# Altium PCB PCB1.PcbDoc
Units mm, origin at the board's own origin, x right, y up, seen from the top; angles counter-clockwise.
Board outline 59 x 26.5 mm, 2 copper layers (Top Layer, Bottom Layer); 34 components, 31 nets, 124 pads, 70 vias.
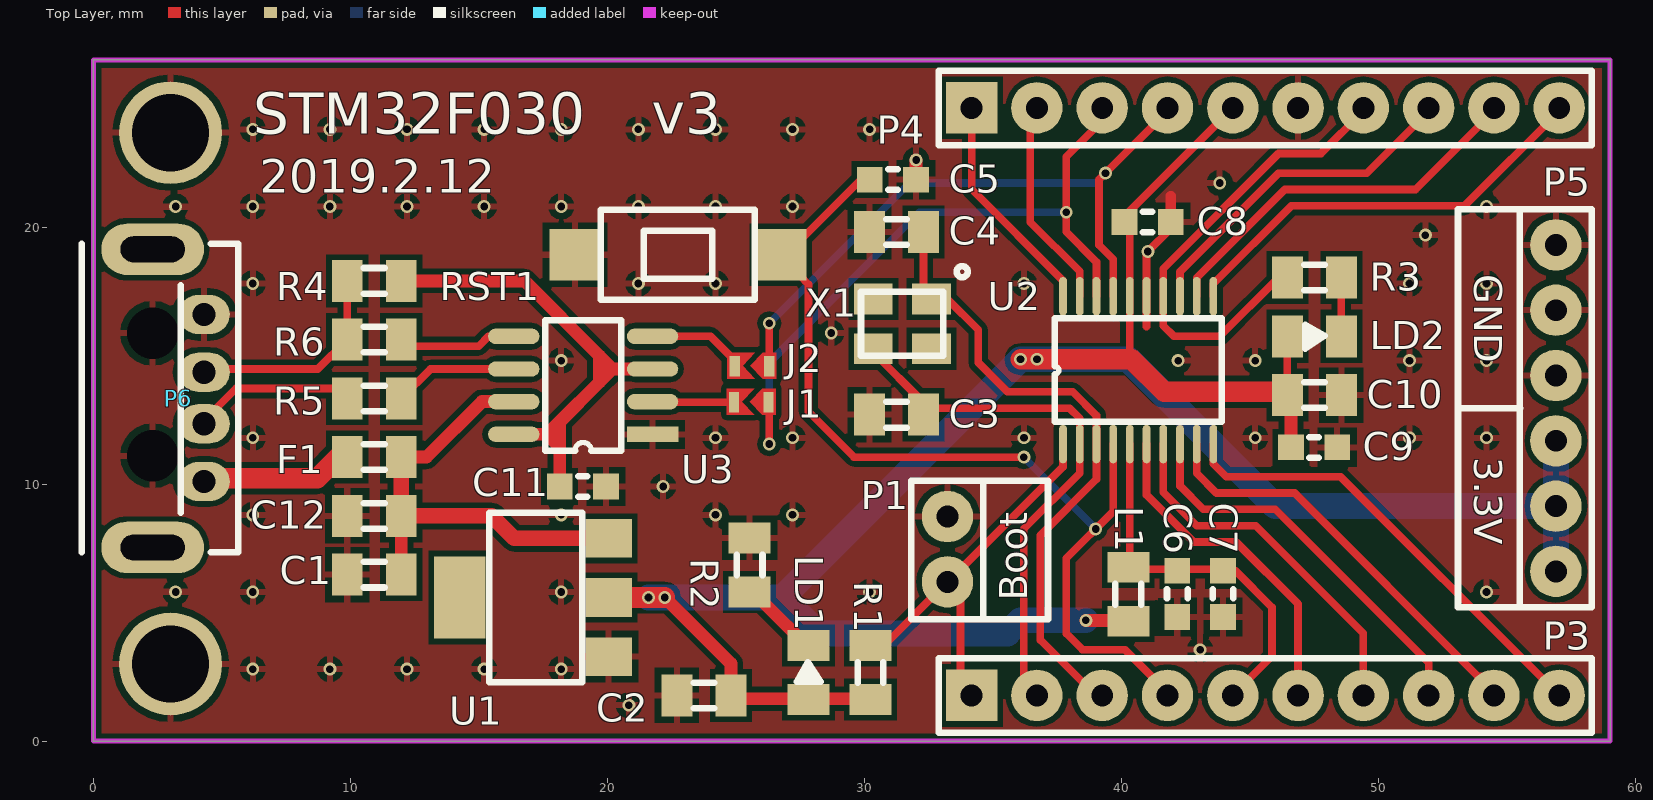
[diagram p0: Top Layer view]
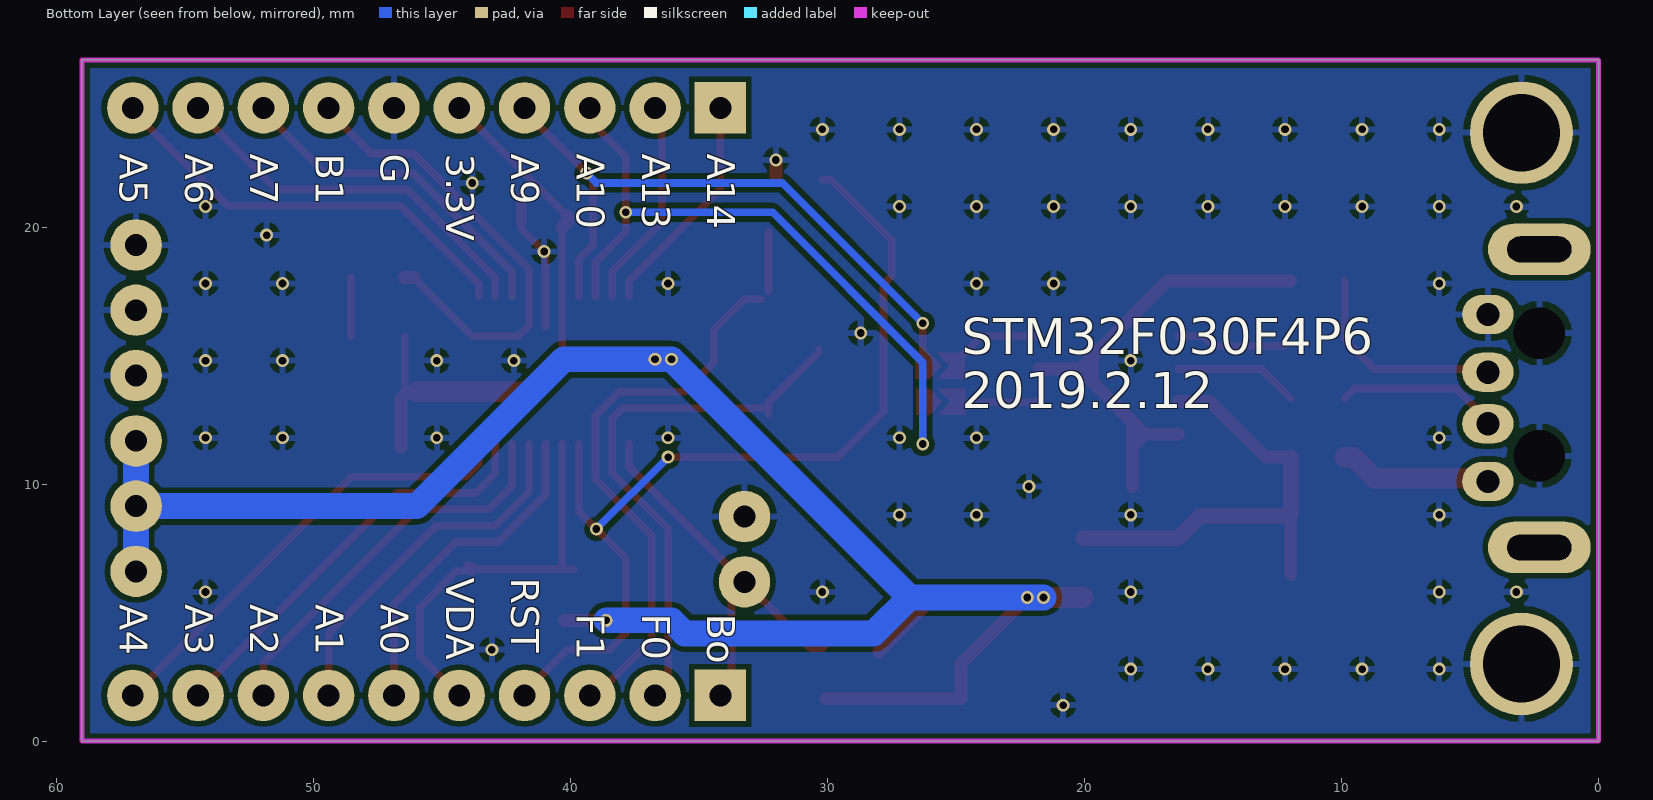
[diagram p1: Bottom Layer view, seen from below]

## Layer stack, top to bottom
Top Solder: solder mask 0.0102, Solder Resist, Dk 3.5
Top Layer: signal copper 0.0356
Dielectric 1: dielectric 0.32, FR-4, Dk 4.8
Bottom Layer: signal copper 0.0356
Bottom Solder: solder mask 0.0102, Solder Resist, Dk 3.5

## Board outline
0,0 0,26.5 59,26.5 59,0

## Design rules (kind name [scope] priority, off if disabled: settings)
Clearance [All] p1: gap=0.21
PolygonConnect [All] p1: connectstyle=Relief reliefconductorwidth=0.254 reliefentries=4 polygonreliefangle="90 Angle" airgapwidth=0.254
RoutingVias [All] p1: holewidth=0.5 width=1.5 viastyle="Through Hole" minholewidth=0.5 minwidth=1.5 maxholewidth=0.5 maxwidth=1.5
ShortCircuit [All] p1: allowed=TRUE
SolderMaskExpansion [All] p1: expansion=0.102
Width [All] p1: maxlimit=1 minlimit=0.25 preferedwidth=0.3
29 further rules are at their usual default settings.

## Classes and differential pairs
component class Sheet1: C1 C2 C3 C4 C5 C6 C7 C8 C9 C10 C11 C12 F1 J1 J2 L1 LD1 LD2 P1 P3 P4 P5 R1 R2 R3 R4 R5 R6 RST1 U1 U3 X1

## Components (designator, comment, footprint, x,y, rotation, side; value= is the part's Value field where it differs from the comment)
C1 "10uF,0805" C0805 10.922,6.477 r180 top
C2 "1uF,0805" C0805 23.749,1.778 r180 top
C3 "15pF,0805" C0805 31.242,12.7 r0 top
C4 "15pF,0805" C0805 31.242,19.812 r180 top
C5 "0.1uF,0603" C0603 31.115,21.844 r0 top
C6 "1uF,0603" C0603 42.164,5.715 r270 top
C7 "0.01uF,0603" C0603 43.942,5.715 r270 top
C8 "0.1uF,0603" C0603 41.021,20.193 r0 top
C9 "0.1uF,0603" C0603 47.498,11.43 r0 top
C10 "4.7uF,0805" C0805 47.498,13.462 r0 top
C11 "0.1uF,0603" C0603 19.05,9.906 r0 top
C12 "10uF,0805" C0805 10.922,8.763 r180 top
F1 "500mA" F0805 10.922,11.049 r180 top
J1 "Jump_2" Jp0603 26.518,13.208 r180 top
J2 "Jump_2" Jp0603 26.543,14.605 r180 top
L1 "80,0805" L0805 40.259,5.715 r90 top
LD1 "G,0805" LED0805 27.813,2.667 r90 top
LD2 "W,0805" LED0805 47.498,15.748 r0 top
P1 "Header_2" Header_2 35.052,12.192 r270 top
P3 "Header_10" Header_10 34.163,1.778 r90 top
P4 "Header_10" Header_10 34.163,24.638 r90 top
P5 "Header_6" Header_6 56.896,16.764 r90 top
P6 "Comment" USB-AO2 2.505,13.386 r270 top
R1 "10K,0805" R0805 30.226,2.667 r270 top
R2 "10K,0805" R0805 25.527,6.858 r270 top
R3 "10K,0805" R0805 47.498,18.034 r0 top
R4 "1.5K,0805" R0805 10.922,17.907 r180 top
R5 "22R,0805" R0805 10.922,13.335 r180 top
R6 "22R,0805" R0805 10.922,15.621 r180 top
RST1 "SW_2P" SW_2P_3 22.733,18.923 r0 top
U1 "AMS1117" SOT-223 17.145,5.588 r90 top
U2 "Comment" TSSOP20 37.719,11.557 r90 top
U3 "PL2303SA" SOP8 19.05,13.843 r180 top
X1 "16MHz" XTAL_SMD_3225 33.06,14.986 r180 top

## Footprints (in the part's own frame and the unit in brackets; to place one, negate y for a bottom-side part, rotate by r counter-clockwise, add the part's x,y. Pads: shape width x height; smd on the part's side, far side on the other; paste and mask are expansions set on the pad)
C0603 [mm]
  rect 1x1 smd: 01(-0.911,0) 02(0.886,0)
  silkscreen extent -0.19,-0.4 0.17,0.4, body extent -0.81,-0.41 0.81,0.41, height 0.58
C0805 [mm]
  rect 1.2x1.63 smd: 01(-1.05,0) 02(1.05,0)
  silkscreen extent -0.4,-0.5 0.4,0.5, body extent -1.05,-0.5 1.05,0.5, height 0.58
F0805 [mm]
  rect 1.2x1.63 smd: 01(-1.05,0) 02(1.05,0)
  silkscreen extent -0.4,-0.5 0.4,0.5, body extent -1.05,-0.5 1.05,0.5, height 0.5
Header_2 [mm]
  round 2 hole 0.85: 01(3.454,-1.829) 02(5.994,-1.829)
  silkscreen extent 2.05,-3.23 7.44,-0.43, body extent 2.18,-3.04 7.26,-0.62, height 11.6
Header_6 [mm]
  round 2 hole 0.85: 01(-10.16,0) 02(-7.62,0) 03(-5.08,0) 04(-2.54,0) 05(0,0) 06(2.54,0)
  silkscreen extent -11.56,-1.4 3.94,1.4, body extent -11.43,-1.21 3.81,1.21, height 11.6
Header_10 [mm]
  rect 2x2 hole 0.85: 01(0,0)
  round 2 hole 0.85: 02(0,-2.54) 03(0,-5.08) 04(0,-7.62) 05(0,-10.16) 06(0,-12.7) 07(0,-15.24) 08(0,-17.78) 09(0,-20.32) 10(0,-22.86)
  silkscreen extent -1.45,-24.13 1.45,1.27, body extent -1.21,-24.13 1.21,1.27, height 11.6
Jp0603 [mm]
  rect 0.4x0.8 smd: 01(0.254,0.025) 02(1.6,0.025)
  Top Layer region: -0.025,0.508 -0.025,-0.508 0.508,-0.508 0.991,0 0.508,0.508
  Top Layer region: 0.813,0.508 1.289,0 0.813,-0.508 1.88,-0.508 1.88,0.508
L0805 [mm]
  rect 1.2x1.63 smd: 01(-1.05,0) 02(1.05,0)
  silkscreen extent -0.4,-0.5 0.4,0.5, body extent -1.05,-0.5 1.05,0.5, height 0.58
LED0805 [mm]
  rect 1.2x1.63 smd: 01(-1.05,0) 02(1.05,0)
  silkscreen extent -0.36,-0.49 0.41,0.45, body extent -1.03,-0.62 0.97,0.62, height 0.81
R0805 [mm]
  rect 1.2x1.63 smd: 01(-1.05,0) 02(1.05,0)
  silkscreen extent -0.4,-0.5 0.4,0.5, body extent -1.05,-0.5 1.05,0.5, height 0.58
SOP8 [mm]
  rect 2x0.6 smd: 01(-2.7,1.905)
  oval 2x0.6 smd: 02(-2.7,0.635) 03(-2.7,-0.635) 04(-2.7,-1.905) 05(2.7,-1.905) 06(2.7,-0.635) 07(2.7,0.635) 08(2.7,1.905)
  silkscreen extent -1.47,-2.54 1.47,2.54, body extent -2.97,-2.39 3.02,2.44, height 1.7
SOT-223 [mm] "SOT-223"
  rect 1.5x1.8 smd: 01(-2.3,-2.9) 02(0,-2.9) 03(2.3,-2.9)
  rect 3.2x2 smd: 04(0,2.9)
  silkscreen extent -3.3,-1.86 3.3,1.75, body extent -3.24,-3.51 3.26,3.45, height 1.65
SW_2P_3 [mm]
  rect 2x2 smd: 01(-4,0) 02(4,0)
  silkscreen extent -3,-1.75 3,1.75, body extent -3,-1.73 3,1.75, height 4.7
TSSOP20 [mm]
  oval 1.5x0.3 smd: 01(0,0) 02(0,-0.65) 03(0,-1.3) 04(0,-1.95) 05(0,-2.6) 06(0,-3.25) 07(0,-3.9) 08(0,-4.55) 09(0,-5.2) 10(0,-5.85) 11(5.75,-5.85) 12(5.75,-5.2) 13(5.75,-4.55) 14(5.75,-3.9) 15(5.75,-3.25) 16(5.75,-2.6) 17(5.75,-1.95) 18(5.75,-1.3) 19(5.75,-0.65) 20(5.75,0)
  silkscreen extent 0.86,-6.18 4.9,0.33, body extent -0.38,-6.22 6.17,0.38, height 1.2
USB-AO2 [mm]
  oval 2x4 hole 1 slot 2.5 at 90 deg: 0(-5.749,-0.203) 0(5.851,-0.203)
  round 1 hole 2: 0(-2.484,-0.203) 0(2.286,-0.203)
  oval 1.524x2 hole 0.9: 01(-3.214,1.797) 02(-0.964,1.797) 03(1.036,1.797) 04(3.286,1.797)
  silkscreen extent -5.96,-2.95 6.04,3.12
XTAL_SMD_3225 [mm]
  rect 1.5x1.2 smd: 01(0.457,-2.21) 02(2.718,-0.279) 03(0.457,-0.279) 04(2.718,-2.21)
  silkscreen extent -0.95,-3.49 3.2,0, body extent 0,-2.5 3.2,0, height 0.6

## Part data
C1 C2 C3 C4 C5 C6 C7 C8 C9 C10 C11 C12: library part Cap
F1: library part Fuse
L1: library part Ind
LD1 LD2: library part "Diode - LED"
R1 R2 R3 R4 R5 R6: library part Res
X1: library part XTAL

## Free pads (board coordinates)
  round 4 hole 3: 2(3,3) 2(3,23.67)

## Via types
v1: diameter 0.5, hole 0.3, Top Layer to Bottom Layer, tented both sides, 70 vias

## Nets (pads, with @x,y where several pads share a name; then routed paths per layer and width w, separated by ;. In a path a pad name is that pad's centre, name@x,y a point inside that pad or via, vN(x,y) a via of type N, cw(c..) or ccw(c..) an arc to the next point about the centre after c; other vN are vias at no path point)
5V: C1.01 C12.01 F1.01 U1.03 U3.07 | length 18.3
  Top Layer w0.5: C1.01 C12.01 ; F1.01 12.954,11.049 15.113,13.208 U3.07
  Top Layer w0.6: F1.01 C12.01 15.494,8.763 16.369,7.888 U1.03
BOOT0: P1.02 P3.01 R1.01 U2.01 | length 16.7
  Top Layer w0.3: R1.01 30.743,3.717 P1.02 ; P3.01@33.731,2.108 P1.02@33.731,5.69 ; P1.02@33.731,6.68 37.719,10.668 U2.01
  Top Layer w0.5: R1.01 R1.01@30.616,3.717 ; P1.02@33.16,6.261 P1.02 33.731,5.69 P1.02@33.731,6.68 ; P1.02@33.249,5.715 P1.02@33.465,5.931 ; P3.01@33.655,2.032 P3.01@33.731,2.108
GND: C1.02 C2.02 C3.01 C4.02 C5.02 C6.02 C7.02 C8.02 C9.02 C10.02 C11.02 C12.02 P1.01 P4.06 P5.04 P5.05 P5.06 P6.0@2.302,11.1 P6.0@2.302,15.87 P6.01 pad.2 R2.01 RST1.01 U1.01 U2.15 U3.01 | length 6.2
  Top Layer w0.3: 40.969,16.129 40.969,18.998 v1(41.021,19.05) 41.907,19.936 C8.02 ; 41.907,21.206 41.91,21.209
  Top Layer w0.4: C8.02 41.907,21.206
  Top Layer w0.5: C5.02@32.004,21.847 v1(32.004,22.606)
  other v1: 20.828,1.397 6.197,2.802 9.197,2.802 12.197,2.802 15.197,2.802 18.197,2.802 43.053,3.556 3.197,5.802 6.197,5.802 18.197,5.802 30.197,5.802 54.197,5.802 6.197,8.802 18.197,8.802 24.197,8.802 27.197,8.802 22.162,9.906 6.197,11.802 24.197,11.802 27.197,11.802 36.197,11.802 45.197,11.802 51.197,11.802 54.197,11.802 18.197,14.802 42.197,14.802 45.197,14.802 51.197,14.802 54.197,14.802 28.702,15.875 6.197,17.802 21.197,17.802 24.197,17.802 36.197,17.802 51.197,17.802 54.197,17.802 51.816,19.685 3.197,20.802 6.197,20.802 9.197,20.802 12.197,20.802 15.197,20.802 18.197,20.802 21.197,20.802 24.197,20.802 27.197,20.802 54.197,20.802 43.815,21.717 6.197,23.802 9.197,23.802 12.197,23.802 15.197,23.802 18.197,23.802 21.197,23.802 24.197,23.802 27.197,23.802 30.197,23.802
NetC11_01: C11.01 R4.01 U3.03 U3.08 | length 20.3
  Top Layer w0.5: R4.01 16.764,17.907 19.685,14.986 ; U3.08 17.653,11.938 ; C11.01 18.139,11.452 ; U3.03 20.193,14.478 ; 17.653,11.938 18.139,11.452 ; 17.653,11.938 18.139,12.424 ; 18.139,11.452 18.139,12.424 ; 18.139,12.424 19.685,13.97 ; 19.685,13.97 19.685,14.986 ; 19.685,13.97 20.193,14.478 ; 19.685,14.986 20.193,14.478
NetF1_02: F1.02 P6.04 | length 5.9
  Top Layer w0.8: P6.04@4.302,10.227 8.703,10.227 9.525,11.049 F1.02
NetLD1_02: LD1.02 R2.02 | length 3
  Top Layer w0.5: R2.02@25.908,5.554 LD1.02@27.999,3.463
NetLD2_02: LD2.02 R3.02 | length 2.3
  Top Layer w0.3: LD2.02 R3.02
NetP2_02: P6.02 R4.02 R6.02 | length 8.3
  Top Layer w0.3: P6.02@4.302,14.477 8.728,14.477 R6.02 R4.02
NetP2_03: P6.03 R5.02 | length 6.2
  Top Layer w0.3: P6.03@4.302,12.477 5.541,13.716 9.491,13.716 R5.02
NetR5_01: R5.01 U3.06 | length 4.9
  Top Layer w0.3: R5.01 13.115,14.478 U3.06
NetR6_01: R6.01 U3.05 | length 4.3
  Top Layer w0.3: R6.01@12.226,15.367 14.986,15.367 15.367,15.748 U3.05
NRST: C5.01 P3.04 RST1.02 U2.04 | length 36.6
  Top Layer w0.3: C5.01 29.845,21.844 27.495,19.494 27.495,18.098 27.813,17.78 27.813,12.827 29.591,11.049 v1(36.195,11.049) ; U2.04 39.669,8.935 37.846,7.112 37.846,4.191 38.481,3.556 40.132,3.556 P3.04@41.783,1.905
  Bottom Layer w0.3: v1(36.195,11.049) v1(38.989,8.255)
OSCIN: C3.02 P3.02 U2.02 X1.02 | length 21.1
  Top Layer w0.254: X1.02@30.342,15.124 X1.02 ; C3.02 32.292,12.954 C3.02@32.292,13.174
  Top Layer w0.3: X1.02@30.342,15.124 C3.02@32.292,13.174 ; C3.02@32.258,12.954 32.292,12.954 37.973,12.954 38.369,12.558 U2.02 38.369,10.429 36.195,8.255 P3.02@36.195,2.032
OSCOUT: C4.01 P3.03 U2.03 X1.01 | length 23.7
  Top Layer w0.3: X1.01@32.292,17.506 C4.01 ; X1.01 33.223,17.196 34.417,16.002 34.417,14.732 35.56,13.589 38.1,13.589 39.019,12.67 U2.03 39.019,10.19 36.83,8.001 36.83,3.937 P3.03@38.735,2.032
PA0: P3.06 U2.06 | length 13.2
  Top Layer w0.3: U2.06 40.969,9.577 42.799,7.747 44.45,7.747 46.863,5.334 P3.06
PA1: P3.07 U2.07 | length 14.3
  Top Layer w0.3: U2.07 41.619,9.689 42.926,8.382 45.212,8.382 49.403,4.191 P3.07
PA2: P3.08 U2.08 | length 15.4
  Top Layer w0.3: U2.08 42.269,9.928 43.18,9.017 45.974,9.017 51.943,3.048 P3.08
PA3: P3.09 U2.09 | length 15.9
  Top Layer w0.3: U2.09 42.919,10.421 43.688,9.652 46.736,9.652 P3.09@53.975,2.413
  Top Layer w0.5: P3.09@53.975,2.032 P3.09@53.975,2.413
PA4: P3.10 U2.10 | length 17.5
  Top Layer w0.3: U2.10 43.569,10.787 44.069,10.287 48.514,10.287 P3.10@56.515,2.286
  Top Layer w0.5: P3.10@56.515,2.032 P3.10@56.515,2.286
PA5: P4.10 U2.11 | length 16.7
  Top Layer w0.3: U2.11 43.569,17.788 46.609,20.828 53.34,20.828 P4.10@57.023,24.511
PA6: P4.09 U2.12 | length 15
  Top Layer w0.3: U2.12 42.919,18.027 46.355,21.463 51.435,21.463 P4.09@54.483,24.511
PA7: P4.08 U2.13 | length 13.2
  Top Layer w0.3: U2.13 42.269,18.266 46.101,22.098 49.53,22.098 P4.08@51.943,24.511
PA9: J2.01 P4.04 U2.17 | length 25.7
  Top Layer w0.3: J2.01 v1(26.289,16.256) ; U2.17 39.669,18.751 39.116,19.304 39.116,21.844 P4.04@41.783,24.511
  Bottom Layer w0.3: v1(26.289,16.256) 31.75,21.717 38.989,21.717 v1(39.37,22.098)
PA10: J1.01 P4.03 U2.18 | length 27.1
  Top Layer w0.3: v1(26.289,11.557) J1.01@26.289,13.157 ; U2.18 39.019,18.639 37.846,19.812 v1(37.846,20.574) 37.846,22.733 P4.03@39.243,24.13
  Top Layer w0.5: J1.01 J1.01@26.289,13.157 ; P4.03@39.243,24.13 P4.03@39.243,24.511
  Bottom Layer w0.3: v1(26.289,11.557) 26.289,14.732 32.131,20.574 v1(37.846,20.574)
PA13: P4.02 U2.19 | length 8.1
  Top Layer w0.3: P4.02@36.449,24.257 36.449,20.193 38.369,18.273 U2.19
  Top Layer w0.5: P4.02@36.449,24.257 P4.02@36.703,24.511
PA14: P4.01 U2.20 | length 8.7
  Top Layer w0.3: P4.01@34.163,24.511 34.163,21.463 37.719,17.907 U2.20
PB1: P4.07 R3.01 U2.14 | length 18.5
  Top Layer w0.3: R3.01@46.101,18.034 43.815,15.748 42.037,15.748 41.619,16.166 U2.14 41.619,18.378 46.101,22.86 47.752,22.86 P4.07@49.403,24.511
  Top Layer w0.5: R3.01@46.101,18.034 R3.01
RXD: J2.02 U3.04 | length 3.8
  Top Layer w0.3: U3.04 24.003,15.748 J2.02@24.943,14.808
  Top Layer w0.5: J2.02 J2.02@24.943,14.808
TXD: J1.02 U3.02 | length 3.1
  Top Layer w0.3: U3.02@21.775,13.183 J1.02
VDD: C2.01 C8.01 C9.01 C10.01 L1.01 LD1.01 LD2.01 P4.05 P5.01 P5.02 P5.03 R1.02 U1.02 U2.16 | length 100
  Top Layer w0.3: C8.01@40.11,20.425 P4.05@44.196,24.511 ; 40.319,14.919 40.319,16.062 U2.16 C8.01@40.319,19.984 ; C10.01 LD2.01
  Top Layer w0.5: v1(22.225,5.588) 24.799,3.014 24.799,1.651 R1.02@30.065,1.651 ; v1(38.608,4.699) L1.01@40.225,4.699 ; C8.01@40.11,20.425 C8.01 C8.01@40.319,19.984 ; P4.05@44.323,24.511 44.704,24.13 P4.05@44.704,24.108 ; C10.01 46.587,13.323 C9.01
  Top Layer w0.8: U1.02 v1(22.225,5.588) ; v1(36.068,14.859) 40.386,14.859 41.656,13.589 C10.01@45.974,13.589
  Bottom Layer w1: v1(21.59,5.588) 26.797,5.588 ; v1(38.608,4.699) 36.068,4.699 35.56,4.191 28.194,4.191 26.797,5.588 ; P5.01 P5.02 ; P5.03 P5.02 ; 26.797,5.588 v1(36.068,14.859) 40.259,14.859 45.974,9.144 P5.02
  other v1: 36.703,14.859
VDDA: C6.01 C7.01 L1.02 P3.05 U2.05 | length 15.8
  Top Layer w0.3: L1.02@39.878,6.686 C7.01@43.851,6.686 ; L1.02@40.319,6.765 U2.05 ; P3.05@43.815,2.032 44.577,2.032 45.847,3.302 45.847,5.207 44.428,6.626 C7.01
  Top Layer w0.5: C7.01@43.851,6.686 C7.01@43.93,6.765
pads on no net: P6.0@2.302,7.535 P6.0@2.302,19.135 U1.04 X1.03 X1.04

## Polygon pours and split planes (outlines as drawn)
GND on Top Layer "TGND" (solid, remove dead copper, pour order 2): 0,0 0,26.5 59,26.5 59,0
GND on Bottom Layer "BGND" (solid, remove dead copper, pour order 1): 0,0 0,26.5 59,26.5 59,0

## Keep-outs
Keep-Out Layer:
  the board outline again, w0.2

## Silkscreen, mask and mechanical layers (free items; w line width, h text height)
Top Overlay:
  lines w0.254: 34.496,4.75 37.135,4.75 37.135,10.138 34.496,10.138 ; 53.086,12.954 55.499,12.954 ; 55.499,5.207 53.086,5.207 53.086,20.701 55.499,20.701
  text "STM32F030" at 6.223,23.622 h1.6
  text "v3" at 21.717,23.622 h1.6
  text "2019.2.12" at 6.477,21.336 h1.3
  text "GND" at 53.721,18.161 h1.1 r270
  text "3.3V" at 53.721,11.049 h1.1 r270
  text "Boot" at 36.322,5.461 h1.1 r90
Bottom Overlay:
  text "A14" at 34.671,22.86 h1.1 r90
  text "A13" at 37.211,22.86 h1.1 r90
  text "A10" at 39.751,22.86 h1.1 r90
  text "A9" at 42.291,22.86 h1.1 r90
  text "3.3V" at 44.831,22.86 h1.1 r90
  text "G" at 47.371,22.86 h1.1 r90
  text "B1" at 49.911,22.86 h1.1 r90
  text "A7" at 52.451,22.86 h1.1 r90
  text "A6" at 54.991,22.86 h1.1 r90
  text "A5" at 57.531,22.86 h1.1 r90
  text "STM32F030F4P6 / 2019.2.12" at 24.765,12.954 h1.4
  text "RST" at 42.291,6.35 h1.1 r90
  text "VDA" at 44.831,6.35 h1.1 r90
  text "A0" at 47.371,5.334 h1.1 r90
  text "A1" at 49.911,5.334 h1.1 r90
  text "A2" at 52.451,5.334 h1.1 r90
  text "A3" at 54.991,5.334 h1.1 r90
  text "A4" at 57.531,5.334 h1.1 r90
  text "Bo" at 34.671,4.953 h1.1 r90
  text "F0" at 37.211,4.953 h1.1 r90
  text "F1" at 39.751,4.953 h1.1 r90
Top Solder:
  rectangle: 24.638,14.097 26.568,15.113
  rectangle: 24.613,12.7 26.543,13.716